# Altium PCB DS158-1.0-B心电图传感器.PcbDoc
Units mm, origin at the board's own origin, x right, y up, seen from the top; angles counter-clockwise.
Board outline 41 x 64 mm, 2 copper layers (Top Layer, Bottom Layer); 35 components, 44 nets, 127 pads, 100 vias.
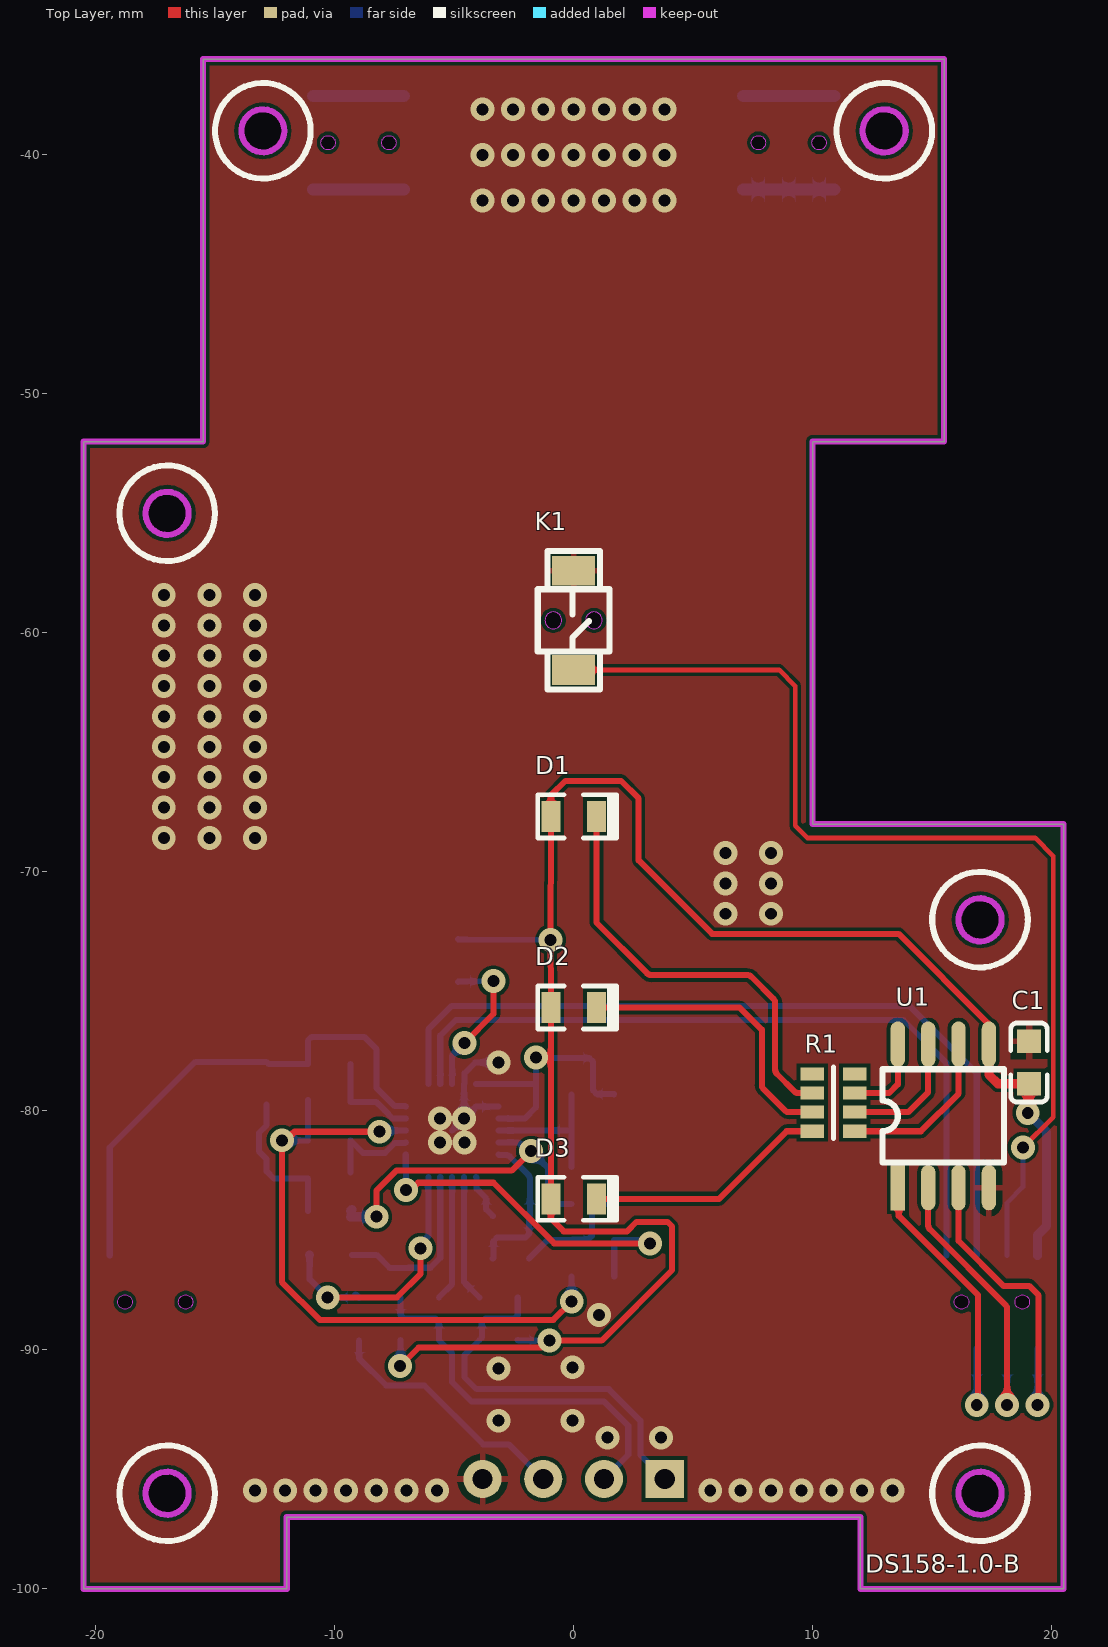
[diagram p0: Top Layer view]
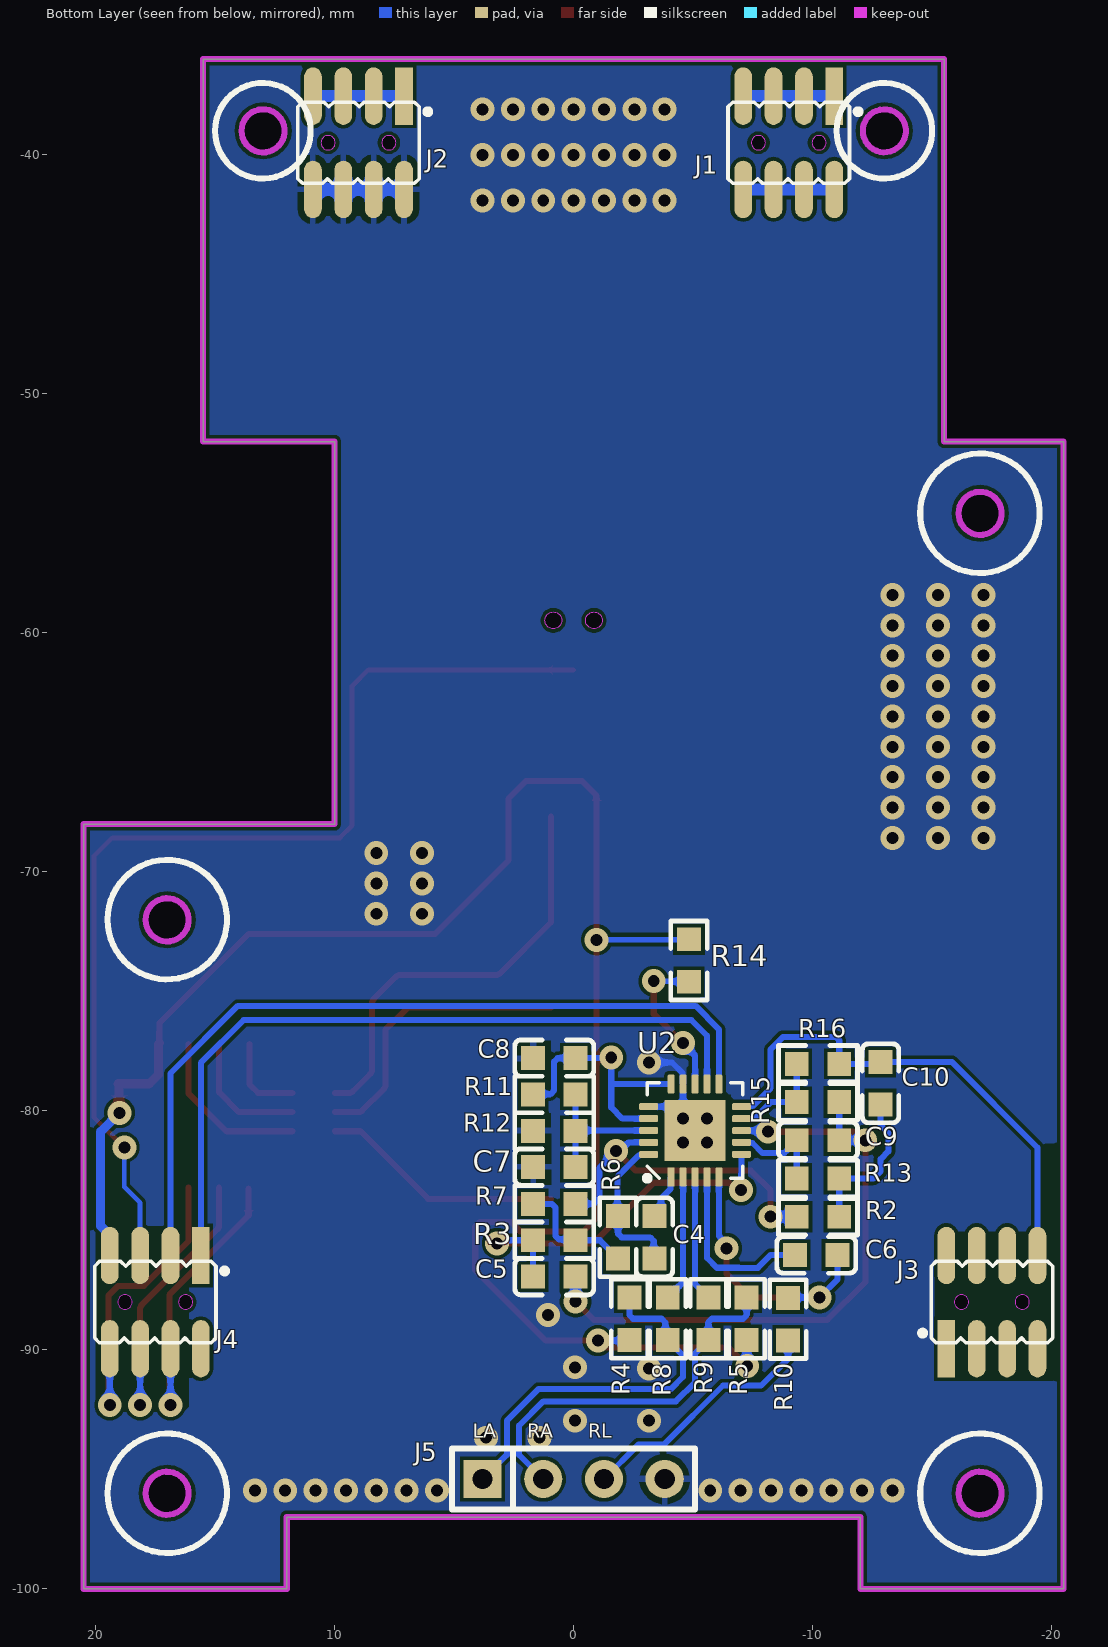
[diagram p1: Bottom Layer view, seen from below]

## Layer stack, top to bottom
Top Solder: solder mask 0.0102, Solder Resist, Dk 3.5
Top Layer: signal copper 0.0356
Dielectric 1: dielectric 0.32, FR-4, Dk 4.8
Bottom Layer: signal copper 0.0356
Bottom Solder: solder mask 0.0102, Solder Resist, Dk 3.5

## Board outline
-20.5,-100 -20.5,-52 -15.5,-52 -15.5,-36 15.5,-36 15.5,-52 10,-52 10,-68 20.5,-68 20.5,-100 12,-100 12,-97 -12,-97 -12,-100
cut-out: -17.9,-96 ccw(c-17,-96) -17,-96.9 ccw(c-17,-96) -16.1,-96 ccw(c-17,-96) -17,-95.1 ccw(c-17,-96)
cut-out: 16.1,-96 ccw(c17,-96) 17,-96.9 ccw(c17,-96) 17.9,-96 ccw(c17,-96) 17,-95.1 ccw(c17,-96)
cut-out: 16.1,-72 ccw(c17,-72) 17,-72.9 ccw(c17,-72) 17.9,-72 ccw(c17,-72) 17,-71.1 ccw(c17,-72)
cut-out: -17.9,-55 ccw(c-17,-55) -17,-55.9 ccw(c-17,-55) -16.1,-55 ccw(c-17,-55) -17,-54.1 ccw(c-17,-55)
cut-out: 12.1,-39 ccw(c13,-39) 13,-39.9 ccw(c13,-39) 13.9,-39 ccw(c13,-39) 13,-38.1 ccw(c13,-39)
cut-out: -13.9,-39 ccw(c-13,-39) -13,-39.9 ccw(c-13,-39) -12.1,-39 ccw(c-13,-39) -13,-38.1 ccw(c-13,-39)
cut-out: -17.9,-96 ccw(c-17,-96) -17,-96.9 ccw(c-17,-96) -16.1,-96 ccw(c-17,-96) -17,-95.1 ccw(c-17,-96)
cut-out: 16.1,-96 ccw(c17,-96) 17,-96.9 ccw(c17,-96) 17.9,-96 ccw(c17,-96) 17,-95.1 ccw(c17,-96)
cut-out: 16.1,-72 ccw(c17,-72) 17,-72.9 ccw(c17,-72) 17.9,-72 ccw(c17,-72) 17,-71.1 ccw(c17,-72)
cut-out: -17.9,-55 ccw(c-17,-55) -17,-55.9 ccw(c-17,-55) -16.1,-55 ccw(c-17,-55) -17,-54.1 ccw(c-17,-55)
cut-out: 12.1,-39 ccw(c13,-39) 13,-39.9 ccw(c13,-39) 13.9,-39 ccw(c13,-39) 13,-38.1 ccw(c13,-39)
cut-out: -13.9,-39 ccw(c-13,-39) -13,-39.9 ccw(c-13,-39) -12.1,-39 ccw(c-13,-39) -13,-38.1 ccw(c-13,-39)

## Design rules (kind name [scope] priority, off if disabled: settings)
Clearance [All] p1: gap=0.152 ignorepadtopadclearanceinfootprint=TRUE
PolygonConnect [All] p1: thpad.connectstyle=Relief thpad.reliefconductorwidth=0.254 thpad.reliefentries=4 thpad.polygonreliefangle="90 Angle" thpad.airgapwidth=0.254 smdpad.connectstyle=Relief smdpad.reliefconductorwidth=0.254 smdpad.reliefentries=4 smdpad.polygonreliefangle="90 Angle" smdpad.airgapwidth=0.254 via.connectstyle=Direct via.reliefconductorwidth=0.254 via.reliefentries=4 via.polygonreliefangle="90 Angle" via.airgapwidth=0.254
RoutingVias [All] p1: holewidth=0.5 width=1 viastyle="Through Hole" minholewidth=0.5 minwidth=1 maxholewidth=0.5 maxwidth=1
SolderMaskExpansion [All] p1: expansion=0.102 istentingtop=FALSE
Width [All] p1: maxlimit=0.508 minlimit=0.152 preferedwidth=0.254
30 further rules are at their usual default settings.

## Components (designator, comment, footprint, x,y, rotation, side; value= is the part's Value field where it differs from the comment)
C1 "SMDCAP00013" 0603CAP 19.05,-77.978 r270 top value=100nF
C4 "MLCC 330nF 50V ±5％ 0603" 0603CAP -3.383,-85.286 r270 bottom value=330nF
C5 "MLCC 330nF 50V ±5％ 0603" 0603CAP 0.809,-86.937 r0 bottom value=330nF
C6 "SMDCAP00008" 0603CAP -10.152,-86.028 r0 bottom value=1nF
C7 "SMDCAP00013" 0603CAP 0.809,-82.347 r180 bottom value=100nF
C8 "SMDCAP00013" 0603CAP 0.809,-77.793 r0 bottom value=100nF
C9 "SMDCAP00010" 0603CAP -10.224,-81.232 r180 bottom value=10nF
C10 "SMDCAP00008" 0603CAP -12.84,-78.847 r90 bottom value=1.5nF
D1 "SMDLED00010" LED_0805 0,-67.68 r0 top value=BLUE
D2 "SMDLED00003" LED_0805 0,-75.68 r0 top value=RED
D3 "Chip 翠绿LED 0805" LED_0805 0,-83.68 r0 top value=GREEN
J1 "X1321WVS-2x04J-C40D53" X1321WVS-2X04J-C40D53 -9,-39.5 r0 bottom locked value=2*4P
J2 "X1321WVS-2x04J-C40D53" X1321WVS-2X04J-C40D53 9,-39.5 r0 bottom locked value=2*4P
J3 "X1321WVS-2x04J-C40D53" X1321WVS-2X04J-C40D53 -17.5,-88 r180 bottom locked value=2*4P
J4 "X1321WVS-2x04J-C40D53" X1321WVS-2X04J-C40D53 17.5,-88 r0 bottom locked value=2*4P
J5 "SL000000042" SIP4 0,-95.402 r180 bottom value=心电图探头
K1 "TS-1185-B-A-A-A" KEY_TS-1185-x-A-A-A 0,-59.48 r270 top
R1 "SMDRES05003" 0603RES_Pack4 10.871,-79.654 r180 top value=510R
R2 "SMDRES00085" 0603RES -10.224,-84.43 r180 bottom value=1M
R3 "SMDRES00085" 0603RES 0.809,-85.413 r0 bottom value=1.4M
R4 "Chip 10M 1/16W ±1％ 0603" 0603RES -2.337,-88.697 r270 bottom value=10M
R5 "Chip 10M 1/16W ±1％ 0603" 0603RES -7.237,-88.697 r270 bottom value=10M
R6 "Chip 10M 1/16W ±1％ 0603" 0603RES -1.859,-85.286 r90 bottom value=10M
R7 "Chip 10M 1/16W ±1％ 0603" 0603RES 0.809,-83.889 r180 bottom value=10M
R8 "Chip 180K 1/16W ±1％ 0603" 0603RES -3.937,-88.697 r90 bottom value=180K
R9 "Chip 180K 1/16W ±1％ 0603" 0603RES -5.637,-88.697 r90 bottom value=180K
R10 "Chip 360K 1/16W ±1％ 0603" 0603RES -8.971,-88.715 r270 bottom value=360K
R11 "Chip 10M 1/16W ±1％ 0603" 0603RES 0.809,-79.317 r180 bottom value=10M
R12 "Chip 10M 1/16W ±1％ 0603" 0603RES 0.809,-80.841 r0 bottom value=10M
R13 "SMDRES00085" 0603RES -10.224,-82.831 r0 bottom value=1M
R14 "SMDRES00056" 0603RES -4.826,-73.711 r90 bottom value=10K
R15 "SMDRES00071" 0603RES -10.224,-79.633 r0 bottom value=100K
R16 "SMDRES00085" 0603RES -10.224,-78.034 r180 bottom value=1M
U1 "SMDIC000018" SO-8 15.469,-80.21 r90 top value=ULN2001
U2 "SMDIC000016" LFCSP_WQ -5.08,-80.823 r90 bottom value=AD8232ACPZ-R7

## Footprints (in the part's own frame and the unit in brackets; to place one, negate y for a bottom-side part, rotate by r counter-clockwise, add the part's x,y. Pads: shape width x height; smd on the part's side, far side on the other; paste and mask are expansions set on the pad)
0603CAP [mm]
  rect 1x1 smd: 1(-0.889,0) 2(0.89,0)
  silkscreen extent -1.65,-0.76 1.65,0.76, body extent -0.8,-0.4 0.8,0.4, height 0.3
0603RES [mm]
  rect 1x1 smd: 1(-0.889,0) 2(0.889,0)
  silkscreen extent -1.65,-0.76 1.65,0.76, body extent -0.8,-0.41 0.8,0.41, height 0.51
0603RES_Pack4 [mm]
  rect 1x0.55 smd mask+0.05: 1(-0.889,1.2) 2(-0.889,0.4) 3(-0.889,-0.4) 4(-0.889,-1.2) 5(0.889,-1.2) 6(0.889,-0.4) 7(0.889,0.4) 8(0.889,1.2)
  silkscreen extent 0,-1.5 0,1.5, body extent -0.8,-1.6 0.8,1.6, height 0.5
KEY_TS-1185-x-A-A-A [mm]
  rect 1.25x1.8 smd: 1(-2.075,0) 2(2.075,0)
  Keep-Out Layer board cut-out: 0.35,-0.85 0.323,-0.716 0.247,-0.603 0.134,-0.527 0,-0.5 0,-0.5 -0.134,-0.527 -0.247,-0.603 -0.323,-0.716 -0.35,-0.85 -0.35,-0.85 -0.323,-0.984 -0.247,-1.097 -0.134,-1.173 0,-1.2 0,-1.2 0.134,-1.173 0.247,-1.097 0.323,-0.984 0.35,-0.85
  Keep-Out Layer board cut-out: -0.35,0.85 -0.323,0.716 -0.247,0.603 -0.134,0.527 0,0.5 0,0.5 0.134,0.527 0.247,0.603 0.323,0.716 0.35,0.85 0.35,0.85 0.323,0.984 0.247,1.097 0.134,1.173 0,1.2 0,1.2 -0.134,1.173 -0.247,1.097 -0.323,0.984 -0.35,0.85
  silkscreen extent -2.9,-1.5 2.9,1.5, body extent -2.5,-1.5 2.5,1.5, height 2
LED_0805 [mm]
  rect 0.8x1.3 smd: 1(-0.95,0) 2(0.95,0)
  silkscreen extent -1.5,-0.9 1.8,0.9, body extent -1,-0.45 1.06,0.45, height 0.85
LFCSP_WQ [mm]
  rect 0.8x0.3 smd mask+0.08: 1(-1.943,1)
  rrect50% 0.8x0.3 smd mask+0.08: 2(-1.943,0.5) 3(-1.943,0) 4(-1.943,-0.5) 5(-1.943,-1) 11(1.943,-1) 12(1.943,-0.5) 13(1.943,0) 14(1.943,0.5) 15(1.943,1)
  rrect50% 0.3x0.8 smd mask+0.08: 6(-1,-1.943) 7(-0.5,-1.943) 8(0,-1.943) 9(0.5,-1.943) 10(1,-1.943) 16(1,1.943) 17(0.5,1.943) 18(0,1.943) 19(-0.5,1.943) 20(-1,1.943)
  rect 2.54x2.54 smd mask+0.102: 21(0,0)
  silkscreen extent -2.1,-2 2,2.1, body extent -2.05,-2.04 2.04,2.05, height 0.79
SIP4 [mm]
  rect 1.6x1.6 hole 0.843: 1(-3.81,0)
  round 1.6 hole 0.843: 2(-1.27,0) 3(1.27,0) 4(3.81,0)
  silkscreen extent -5.08,-1.27 5.08,1.27, body extent -5.08,-1.27 5.08,1.27, height 8.64
SO-8 [mm]
  rect 1.9x0.6 smd: 1(-3,1.905)
  oval 1.9x0.6 smd: 2(-3,0.635) 3(-3,-0.635) 4(-3,-1.905) 5(3,-1.905) 6(3,-0.635) 7(3,0.635) 8(3,1.905)
  silkscreen extent -1.95,-2.54 1.95,2.54, body extent -3.07,-2.44 3.07,2.44, height 1.77
X1321WVS-2X04J-C40D53 [mm]
  rect 0.74x2.4 smd: 1(-1.905,-1.95)
  oval 0.74x2.4 smd: 2(-1.905,1.95) 3(-0.635,-1.95) 4(-0.635,1.95) 5(0.635,-1.95) 6(0.635,1.95) 7(1.905,-1.95) 8(1.905,1.95)
  Keep-Out Layer board cut-out: -1.57,0 -1.547,-0.115 -1.482,-0.212 -1.385,-0.277 -1.27,-0.3 -1.27,-0.3 -1.155,-0.277 -1.058,-0.212 -0.993,-0.115 -0.97,0 -0.97,0 -0.993,0.115 -1.058,0.212 -1.155,0.277 -1.27,0.3 -1.27,0.3 -1.385,0.277 -1.482,0.212 -1.547,0.115 -1.57,0
  Keep-Out Layer board cut-out: 1.57,0 1.547,0.115 1.482,0.212 1.385,0.277 1.27,0.3 1.27,0.3 1.155,0.277 1.058,0.212 0.993,0.115 0.97,0 0.97,0 0.993,-0.115 1.058,-0.212 1.155,-0.277 1.27,-0.3 1.27,-0.3 1.385,-0.277 1.482,-0.212 1.547,-0.115 1.57,0
  silkscreen extent -3,-1.7 2.54,1.7, body extent -2.54,-2.6 2.54,2.6, height 5.5

## Part data
C1 C7 C8: library part "MLCC 100nF 50V ±10％ 0603", "贴片电容"
C4 C5: "贴片电容"
C6: library part "MLCC 1nF 50V ±10％ 0603", "贴片电容"
C9: library part "MLCC 10nF 50V ±10％ 0603", "贴片电容"
C10: library part "MLCC 1.5nF 50V ±10％ 0603", "贴片电容"
D1: library part "Chip 蓝色LED 0805", "贴片LED"
D2: library part "Chip 红色LED 0805", "贴片LED"
D3: "贴片LED"
J1 J2 J3 J4: "双排针2x4P 立贴 1.27mm"
J5: library part "DIP4 单排直针 间距2.54mm 针长11mm 铜"
K1: "轻触开关"
R1: library part "Chip R*4 510R 1/16W ±5％ 0603", "贴片排阻"
R2 R13 R16: library part "Chip 1M 1/16W ±1％ 0603", "贴片电阻"
R3: library part "Chip 1.4M 1/16W ±1％ 0603", "贴片电阻"
R4 R5 R6 R7 R8 R9 R10 R11 R12: "贴片电阻"
R14: library part "Chip 10K 1/16W ±1％ 0603", "贴片电阻"
R15: library part "Chip 100K 1/16W ±1％ 0603", "贴片电阻"
U1: library part "ULN2001 SOP-8", "电机驱动芯片"
U2: library part AD8232ACPZ-R7, "仪表放大器"

## Via types
v1: diameter 1, hole 0.5, Top Layer to Bottom Layer, tented both sides, 96 vias
v2: diameter 1, hole 0.5, Top Layer to Bottom Layer, tented top, 4 vias

## Nets (pads, with @x,y where several pads share a name; then routed paths per layer and width w, separated by ;. In a path a pad name is that pad's centre, name@x,y a point inside that pad or via, vN(x,y) a via of type N, cw(c..) or ccw(c..) an arc to the next point about the centre after c; other vN are vias at no path point)
ADC0: C10.2 J3.8 R16.2 U2.10 | length 21.6
  Bottom Layer w0.254: J3.8 -19.405,-81.533 -15.823,-77.952 ; -15.823,-77.957 C10.2 -12.763,-78.034 R16.2 -11.112,-77.052 -10.964,-76.903 -8.764,-76.903 -8.239,-77.428 -8.239,-79.047 -7.486,-79.8 -7.046,-79.8 U2.10
ADC1: J4.2
DAC_OUT: J3.6
Dis_blue_EN: J4.4 U1.1 | length 12.8
  Top Layer w0.254: U1.1@13.603,-83.25 13.603,-84.393 16.911,-87.701 16.911,-92.257 v1(16.865,-92.303)
  Bottom Layer w0.254: v1(16.865,-92.303) J4.4
Dis_green_EN: J4.8 U1.3 | length 13.5
  Top Layer w0.254: U1.3 16.104,-85.446 17.977,-87.319 19.052,-87.319 19.451,-87.718 19.451,-92.257 v1(19.405,-92.303)
  Bottom Layer w0.254: v1(19.405,-92.303) J4.8
Dis_red_EN: J4.6 U1.2 | length 12.8
  Top Layer w0.254: U1.2 14.834,-84.782 ccw(c15.088,-84.782) 14.908,-84.961 18.061,-88.114 cw(c17.881,-88.293) 18.135,-88.293 v1(18.135,-92.303)
  Bottom Layer w0.254: v1(18.135,-92.303) J4.6
GND: C1.1 C7.1 C8.2 J2.2 J2.4 J2.6 J2.8 J5.4 K1.1 R12.2 U1.4 U2.14 U2.16 U2.21 | length 9.7
  Bottom Layer w0.254: U2.21 v2(-4.58,-80.323) ; v1(-3.15,-77.978) -4.115,-77.978 -4.557,-78.42 -4.557,-78.857 U2.14 v2(-4.58,-80.323) ; U2.16 -4.08,-79.823 v2(-4.58,-80.323)
  Bottom Layer w0.508: J2.2 J2.4 J2.6 J2.8
  other v1: -13.335,-95.885 -12.065,-95.885 -10.795,-95.885 -9.525,-95.885 -8.255,-95.885 -6.985,-95.885 -5.715,-95.885 5.715,-95.885 6.985,-95.885 8.255,-95.885 9.525,-95.885 10.795,-95.885 12.065,-95.885 13.335,-95.885 1.422,-93.675 3.658,-93.675 -3.15,-92.964 -0.051,-92.964 -3.15,-90.78 -0.051,-90.729 1.067,-88.544 6.35,-71.755 8.255,-71.755 6.35,-70.485 8.255,-70.485 6.35,-69.215 8.255,-69.215 -17.145,-68.58 -15.24,-68.58 -13.335,-68.58 -17.145,-67.31 -15.24,-67.31 -13.335,-67.31 -17.145,-66.04 -15.24,-66.04 -13.335,-66.04 -17.145,-64.77 -15.24,-64.77 -13.335,-64.77 -17.145,-63.5 -15.24,-63.5 -13.335,-63.5 -17.145,-62.23 -15.24,-62.23 -13.335,-62.23 -17.145,-60.96 -15.24,-60.96 -13.335,-60.96 -17.145,-59.69 -15.24,-59.69 -13.335,-59.69 -17.145,-58.42 -15.24,-58.42 -13.335,-58.42 -3.81,-41.91 -2.54,-41.91 -1.27,-41.91 0,-41.91 1.27,-41.91 2.54,-41.91 3.81,-41.91 -3.81,-40.005 -2.54,-40.005 -1.27,-40.005 0,-40.005 1.27,-40.005 2.54,-40.005 3.81,-40.005 -3.81,-38.1 -2.54,-38.1 -1.27,-38.1 0,-38.1 1.27,-38.1 2.54,-38.1 3.81,-38.1
  other v2: -5.588,-81.331 -4.572,-81.331 -5.588,-80.315
I2C1_SCL: J4.1 U2.12 | length 32.3
  Bottom Layer w0.254: U2.12 -5.58,-76.852 -4.928,-76.2 13.8,-76.2 15.595,-77.995 J4.1
I2C1_SDA: J4.3 U2.11 | length 34.4
  Bottom Layer w0.254: U2.11 -6.08,-76.59 -5.102,-75.613 14.043,-75.613 16.865,-78.435 J4.3
KEY_HOME: J4.5 K1.2 | length 44.2
  Top Layer w0.2: K1.2 8.596,-61.555 9.271,-62.23 9.271,-68.072 9.779,-68.58 19.304,-68.58 20.066,-69.342 20.066,-80.264 v1(18.796,-81.534)
  Bottom Layer w0.2: J4.5 18.135,-83.846 18.796,-83.185 v1(18.796,-81.534)
LA: J5.1 R4.1 R8.1 | length 15.9
  Bottom Layer w0.254: R4.1 -2.337,-88.548 -2.486,-88.697 -3.683,-88.697 -3.84,-88.854 -3.84,-89.489 R8.1 -4.572,-90.221 -4.572,-91.135 -4.064,-91.643 1.473,-91.643 2.794,-92.964 2.794,-94.386 J5.1
LED_blue: D1.2 R1.6 | length 18.1
  Top Layer w0.254: D1.2 0.95,-72.121 3.075,-74.246 ccw(c3.255,-74.066) 3.255,-74.32 7.261,-74.32 cw(c7.261,-74.574) 7.441,-74.395 8.358,-75.313 cw(c8.179,-75.492) 8.433,-75.492 8.433,-78.279 ccw(c8.687,-78.279) 8.507,-78.459 9.229,-79.181 ccw(c9.408,-79) 9.407,-79.254 R1.6
LED_green: D3.2 R1.8 | length 10.2
  Top Layer w0.254: D3.2 6.087,-83.68 8.913,-80.854 R1.8
LED_red: D2.2 R1.7 | length 12.2
  Top Layer w0.254: D2.2 6.948,-75.68 7.874,-76.606 7.874,-78.914 ccw(c8.128,-78.914) 7.948,-79.094 8.835,-79.981 ccw(c9.014,-79.8) 9.013,-80.054 R1.7
LL: J5.3 R10.2 | length 10.5
  Bottom Layer w0.254: R10.2 -8.971,-90.366 -7.847,-91.491 -6.248,-91.491 -3.785,-93.955 -2.718,-93.955 J5.3
NetC4_1: C4.1 U2.1 | length 1.9
  Bottom Layer w0.254: U2.1 -4.057,-82.789 -4.057,-83.268 -3.66,-83.665 -3.66,-84.121 C4.1
NetC4_2: C4.2 R6.2 U2.20 | length 6.4
  Bottom Layer w0.254: C4.2 -3.351,-86.145 -3.351,-85.444 -3.2,-85.293 -2.008,-85.293 -1.859,-85.144 R6.2 -1.829,-84.367 -1.829,-82.858 ccw(c-2.083,-82.858) -1.903,-82.679 -2.663,-81.919 ccw(c-2.841,-82.1) -2.841,-81.846 -3.114,-81.846 U2.20
NetC5_2: C5.2 R3.2 U2.6 | length 16
  Top Layer w0.254: v1(-7.01,-83.312) -6.809,-83.312 -6.504,-83.007 -3.353,-83.007 -0.813,-85.547 v1(3.2,-85.547)
  Bottom Layer w0.254: U2.6@-7.023,-81.846 v1(-7.01,-83.312) ; U2.6@-7.023,-81.846 U2.6 ; C5.2 1.699,-85.414 R3.2 3.067,-85.413 v1(3.2,-85.547)
NetC6_1: C6.1 R10.1 U2.5 | length 12
  Top Layer w0.254: v1(-10.287,-87.808) -7.391,-87.808 -6.401,-86.817 v1(-6.401,-85.75)
  Bottom Layer w0.254: C6.1 -11.041,-87.053 v1(-10.287,-87.808) -9.244,-87.808 -9.117,-87.681 R10.1 ; v1(-6.401,-85.75) -6.401,-85.549 -6.08,-85.229 U2.5
  Bottom Layer w0.381: C6.1@-11.048,-86.035 C6.1
NetC6_2: C6.2 U2.4 | length 7.5
  Bottom Layer w0.254: C6.2 -8.242,-86.028 -7.702,-86.569 -6.914,-86.569 -6.909,-86.563 -5.994,-86.563 -5.58,-86.149 U2.4
NetC7_2: C7.2 R11.2 R12.1 U2.18 | length 6.1
  Bottom Layer w0.254: U2.18 -0.099,-80.823 R12.1 ; C7.2 R12.1 ; R12.1 R12.1 ; R11.2 -0.081,-79.318 R12.1
NetC9_1: C9.1 R13.2 U2.7 | length 4
  Bottom Layer w0.254: R13.2@-9.335,-82.572 C9.1 C9.1@-9,-81.567 ; C9.1@-8.935,-81.641 -8.814,-81.763 -7.899,-81.763 -7.483,-81.346 -7.046,-81.346 U2.7
NetC10_1: C10.1 R2.2 R13.1 | length 6.3
  Bottom Layer w0.254: C10.1 -12.84,-80.596 -13.17,-80.926 -13.17,-81.695 -12.84,-82.026 -12.84,-82.53 -12.539,-82.831 R13.1 R2.2@-11.113,-84.181
NetR1_1: R1.1 U1.6 | length 7.1
  Top Layer w0.254: R1.1 14.529,-80.854 16.104,-79.28 U1.6
NetR1_2: R1.2 U1.7 | length 5.4
  Top Layer w0.254: R1.2 14.002,-80.054 14.834,-79.223 U1.7
NetR1_3: R1.3 U1.8 | length 3.6
  Top Layer w0.254: R1.3 13.202,-79.254 13.564,-78.892 U1.8
NetR2_1: R2.1 R7.2 U2.19 | length 14.3
  Top Layer w0.254: v1(-8.242,-84.43) -8.242,-83.325 -7.417,-82.499 -2.591,-82.499 v1(-1.778,-81.686)
  Bottom Layer w0.254: U2.19 -2.3,-81.323 -1.936,-81.686 v1(-1.778,-81.686) -1.078,-82.386 -1.078,-83.653 -0.842,-83.889 R7.2
  Bottom Layer w0.381: R2.1 v1(-8.242,-84.43) ; R2.1@-9.335,-84.181 R2.1@-9.284,-84.13
NetR3_1: R3.1 R6.1 R7.1 | length 5.2
  Bottom Layer w0.254: R6.1 -1.097,-85.413 R3.1 -0.045,-85.378 0.613,-85.378 0.762,-85.229 0.762,-84.038 0.911,-83.889 R7.1
NetR8_2: R8.2 U2.2 | length 5.3
  Bottom Layer w0.254: U2.2 -4.58,-87.165 R8.2
NetR9_2: R9.2 U2.3 | length 5.3
  Bottom Layer w0.254: R9.2 -5.08,-87.251 U2.3
NetR15_2: R15.2 R16.1 U2.9 | length 4.1
  Bottom Layer w0.254: R15.2 -8.251,-79.633 -8.176,-79.708 -7.905,-79.979 -7.561,-80.323 U2.9 ; R15.2@-9.335,-79.558 R16.1
RA: J5.2 R5.1 R9.1 | length 15.9
  Bottom Layer w0.254: R5.1 -7.239,-87.81 -7.239,-88.548 -7.09,-88.697 -5.786,-88.697 -5.637,-88.846 R9.1 -5.08,-90.143 ; -5.08,-90.221 -5.08,-91.346 -4.274,-92.151 1.263,-92.151 2.286,-93.174 2.286,-94.386 J5.2
REF_OUT: C5.1 C9.2 R15.1 U2.8 | length 28
  Top Layer w0.254: v1(-8.128,-80.874) -11.68,-80.874 -12.039,-81.232 v1(-12.202,-81.232) -12.202,-87.163 -10.617,-88.748 -9.804,-88.748 -0.848,-88.748 v1(-0.08,-87.98)
  Bottom Layer w0.254: v1(-12.202,-81.232) C9.2 ; C9.2@-11.112,-81.081 R15.1 R15.1@-11.112,-79.558 ; v1(-8.128,-80.874) -7.727,-80.823 U2.8 ; v1(-0.08,-87.98) C5.1
SDN: R14.1 U2.13 | length 6.5
  Top Layer w0.254: v1(-4.572,-77.165) -3.353,-75.946 v1(-3.353,-74.574)
  Bottom Layer w0.254: U2.13 -5.08,-77.687 -4.572,-77.179 v1(-4.572,-77.165) ; R14.1 -4.453,-74.593 ccw(c-4.453,-74.339) -4.45,-74.593 v1(-3.353,-74.574)
SPI2_CS: J3.4
SPI2_MISO: J3.1
SPI2_MOSI: J3.3
SPI2_SCK: J3.2
USART2_RXD: J3.5
USART2_TXD: J3.7
VBUS: J1.2 J1.4 J1.6 J1.8 | length 3.8
  Bottom Layer w0.508: J1.2 J1.4 J1.6 J1.8
VCC_3V3_MCU: C1.2 C8.1 D1.1 D2.1 D3.1 J4.7 R4.2 R5.2 R11.1 R14.2 U1.5 U2.15 U2.17 | length 92.5
  Top Layer w0.254: v1(-7.264,-90.678) -6.49,-89.903 -1.343,-89.903 -1.05,-89.611 v1(-1.016,-89.611) 1.168,-89.611 4.115,-86.665 4.115,-84.836 3.93,-84.651 2.623,-84.651 2.235,-85.039 -0.413,-85.039 -0.95,-84.503 D3.1 ; v1(-1.575,-77.775) -1.556,-77.793 -0.95,-77.793 ; D3.1@-1.008,-83.134 cw(c-1.26,-83.159) -1.007,-83.157 D3.1 ; v1(-0.965,-72.847) -0.953,-75.157 D2.1 -0.95,-77.793 ; v1(-0.965,-72.847) -0.952,-68.203 D1.1 -0.95,-66.802 -0.34,-66.192 1.981,-66.192 2.718,-66.929 2.718,-69.52 5.796,-72.598 13.594,-72.598 17.332,-76.336 U1.5@17.332,-77.168 ; D3.1 -0.95,-77.793
  Top Layer w0.381: U1.5@17.332,-77.168 U1.5 17.374,-78.486 17.756,-78.868 C1.2 19.025,-78.893 19.025,-80.061 v1(18.999,-80.086)
  Bottom Layer w0.254: v1(-7.264,-90.678) -7.237,-90.651 R5.2 ; R14.2 -4.453,-72.824 v1(-0.965,-72.847) ; U2.15 -1.575,-78.88 ; U2.17 -2.04,-80.323 -1.575,-79.858 -1.575,-78.88 ; R4.2 -2.312,-89.611 v1(-1.016,-89.611) ; R11.1 1.68,-79.299 0.966,-79.299 0.813,-79.146 0.813,-77.942 0.664,-77.793 C8.1 -1.241,-77.793 cw(c-1.241,-77.539) -1.255,-77.793 v1(-1.575,-77.775) -1.575,-78.88
  Bottom Layer w0.381: v1(18.999,-80.086) 19.787,-80.874 19.787,-84.817 19.405,-85.199 J4.7
VCC_5V: J2.1 J2.3 J2.5 J2.7 | length 3.8
  Bottom Layer w0.508: J2.1 J2.3 J2.5 J2.7
VSS: J1.1 J1.3 J1.5 J1.7 | length 3.8
  Bottom Layer w0.508: J1.1 J1.3 J1.5 J1.7
pads on no net: R1.4 R1.5

## Polygon pours and split planes (outlines as drawn)
GND on Top Layer "GND_L01_P001" (solid, remove dead copper, pour order 1): -20.5,-100 -20.5,-52 -15.5,-52 -15.5,-36 15.5,-36 15.5,-52 10,-52 10,-68 20.5,-68 20.5,-100 12,-100 12,-97 -12,-97 -12,-100
GND on Bottom Layer "GND_L02_P002" (solid, remove dead copper, pour order 2): -20.5,-100 -20.5,-52 -15.5,-52 -15.5,-36 15.5,-36 15.5,-52 10,-52 10,-68 20.5,-68 20.5,-100 12,-100 12,-97 -12,-97 -12,-100

## Keep-outs
Keep-Out Layer:
  circle w0.254: c-13,-39 r0.9
  circle w0.254: c12.992,-39.002 r0.903
  circle w0.254: c17.005,-72.009 r0.903
  circle w0.254: c-17.005,-55.004 r0.903
  circle w0.254: c17.005,-95.999 r0.903
  circle w0.254: c-17.005,-95.999 r0.903
  lines w0.254: -20.5,-100 -12,-100 -12,-97 12,-97 12,-100 20.5,-100 20.5,-68 10,-68 10,-52 15.5,-52 15.5,-36 -15.5,-36 -15.5,-52 -20.5,-52 -20.5,-100

## Other copper
Bottom Layer:
  pour cut-out: -5.492,-85.803 -5.492,-87.006 -5.365,-87.133 -6.289,-88.057 -6.289,-88.412 -6.585,-88.412 -6.553,-88.381 -6.553,-86.309
  pour cut-out: -4.295,-83.613 -3.553,-84.355 -3.553,-85.243 -3.302,-85.243 -1.626,-86.919 -1.685,-86.978 -1.685,-88.46 -4.402,-88.46 -4.521,-88.341
  pour cut-out: 16.087,-85.302 16.087,-84.811 16.744,-84.811 20.015,-84.811 20.015,-92.604 16.306,-92.604 16.087,-92.385
  pour cut-out: -15.103,-85.016 -15.126,-85.039 -20.117,-85.039 -20.117,-91.262 -20.077,-91.302 -15.073,-91.302
  pour cut-out: -19.775,-81.362 -20.112,-81.362 -20.112,-85.039 -19.902,-85.039 -19.858,-84.996 -19.858,-84.937

## Silkscreen, mask and mechanical layers (free items; w line width, h text height)
Top Overlay:
  circle w0.254: c-17,-96 r2
  circle w0.254: c17,-96 r2
  circle w0.254: c17,-72 r2
  circle w0.254: c-17,-55 r2
  circle w0.254: c-13,-39 r2
  circle w0.254: c13,-39 r2
  text "DS158-1.0-B" at 12.192,-99.568 h1.27
Bottom Overlay:
  circle w0.254: c-17,-96 r2.5
  circle w0.254: c17,-96 r2.5
  circle w0.254: c17,-72 r2.5
  circle w0.254: c-17,-55 r2.5
  circle w0.254: c-13,-39 r2
  circle w0.254: c13,-39 r2
  text "RL" at -0.61,-93.878 h1
  text "RA" at 1.93,-93.878 h1
  text "LA" at 4.216,-93.878 h1
Mechanical 1:
  circle w0.254: c17,-72 r0.9
  circle w0.254: c-13,-39 r0.9
  circle w0.254: c13,-39 r0.9
  circle w0.254: c-17,-55 r0.9
  circle w0.254: c17,-96 r0.9
  circle w0.254: c-17,-96 r0.9
  lines w0.254: -20.5,-100 -12,-100 -12,-97 12,-97 12,-100 20.5,-100 20.5,-68 10,-68 10,-52 15.5,-52 15.5,-36 -15.5,-36 -15.5,-52 -20.5,-52 -20.5,-100
Mechanical 15:
  lines w0.15: -4.485,-36 -4.485,-44.41 4.485,-44.41 4.485,-36
  lines w0.508: -16,-51 16,-51